# EAGLE board DC_bias_circuit (EAGLE 6.5.0)
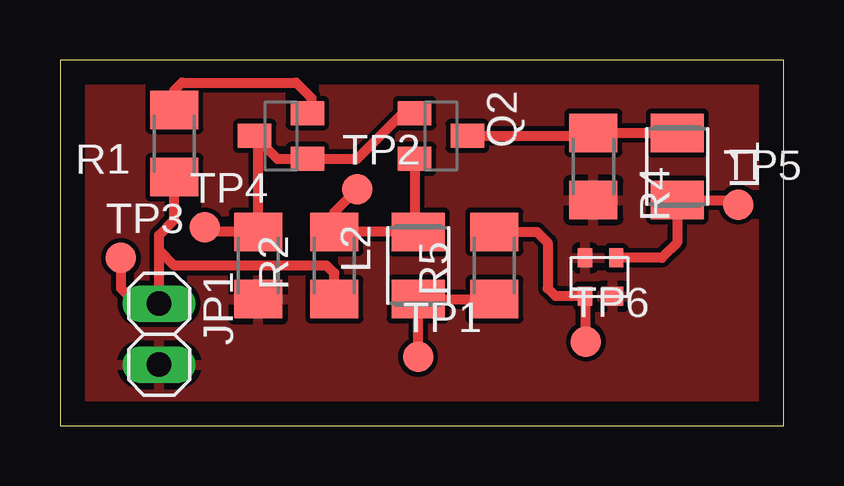
[diagram p0: board, top side]

Size 30.15 x 15.23 mm. Coordinates in mm from the lower left corner, seen from the top.
Outline: 0,0 30.15,0 30.15,15.23 0,15.23 0,0
Copper layers (1*16): Top 0.035mm / dielectric 1.5mm / Bottom 0.035mm
Design rules "default": minimum track width 10mil, minimum drill 24mil, track to track 8mil, track to pad 8mil, pad to pad 8mil, via to via 8mil, smd to smd 8mil, copper to edge 40mil, drill to drill 8mil, minimum pad ring 10mil, minimum via ring 8mil, stop-mask expansion 4mil, vias tented up to drill 0mil, thermal gap 10mil

## Footprints (pad centres in the part's own frame; a part is rotated, then mirrored left to right if it is on the bottom)
1X02 = drill 1.016 long: 1 -1.27,0; 2 1.27,0
L3225M = smd 1.6 x 2.2: 1 -1.4,0; 2 1.4,0
SOT23-BEC = smd 1 x 1.4: B -0.95,-1.1; C 0,1.1; E 0.95,-1.1
SOT-343 = smd 0.6 x 0.8: 1 1.3,1.6; 3 0,0; 4 1.3,0 | smd 0.9 x 0.8: 2 0.15,1.6
M1206 = smd 1.6 x 2: 1 -1.4,0; 2 1.4,0
B1,27 = smd 1.27 x 1.27: TP 0,0

## Placement (x,y rotation side)
JP1  [1X02]  4.13,3.81 270 top
L1  820nH  [L3225M]  25.72,10.79 270 top
L2  820nH  [L3225M]  14.92,6.67 270 top
Q1  MMBT3906LT1SMD  [SOT23-BEC]  9.21,12.06 90 top
Q2  MMBT3906LT1SMD  [SOT23-BEC]  15.88,12.06 270 top
Q3  SAV-541+  [SOT-343]  23.18,6.99 180 top
R1  3570  [M1206]  4.76,11.75 270 top
R2  33.2  [M1206]  11.43,6.67 270 top
R3  4320  [M1206]  8.26,6.67 270 top
R4  4320  [M1206]  22.23,10.79 270 top
R5  xxx  [M1206]  18.1,6.67 90 top
TP1  TPB1,27  [B1,27]  14.92,2.86 0 top
TP2  TPB1,27  [B1,27]  12.38,9.84 0 top
TP3  TPB1,27  [B1,27]  2.54,6.99 0 top
TP4  TPB1,27  [B1,27]  6.03,8.26 0 top
TP5  TPB1,27  [B1,27]  28.26,9.21 0 top
TP6  TPB1,27  [B1,27]  21.91,3.49 0 top

## Library data of the parts
JP1 = pinhead
L1 L2 = resistor
Q1 Q2 = transistor-pnp
Q3 = ECE532_Parts
R1-R5 = rcl
TP1-TP6 = testpad

## Nets
+5V: JP1.1 R1.2 R2.2 TP3.TP
DRAIN: Q3.1 R5.2 TP6.TP
GATE: L1.2 Q3.3 TP5.TP
GND: JP1.2 Q3.2 Q3.4 R3.2 R4.2
N$1: Q1.B Q1.C Q2.B R3.1 TP4.TP
N$2: L1.1 Q2.C R4.1
N$4: Q1.E R1.1
N$6: L2.1 Q2.E R2.1 TP2.TP
N$9: L2.2 R5.1 TP1.TP

## Tracks (layer width: path | path; a pad name or v marks a point on that pad's centre or on a via)
+5V
  Top 0.406: 4.13,7.3 JP1.1 3.17,5.08 2.54,5.71 TP3.TP | 4.13,7.3 4.13,7.94 4.76,8.57 R1.2 | R2.2 11.43,6.35 11.11,6.67 4.76,6.67 4.13,7.3
DRAIN
  Top 0.406: R5.2 19.87,8.07 20.32,7.62 20.32,5.71 20.64,5.4 21.86,5.4 Q3.1 21.88,3.52 TP6.TP
GATE
  Top 0.406: Q3.3 25.08,6.99 25.72,7.62 L1.2 28.07,9.39 TP5.TP
GND
  pour Top: -3.17,0 33.02,0 33.02,26.04 0,26.04
N$1
  Top 0.406: Q2.B 14.29,13.02 12.38,11.11 Q1.B 9.06,11.12 Q1.C 8.26,11.92 R3.1 6.22,8.07 TP4.TP
N$2
  Top 0.406: Q2.C 22.36,12.06 | 22.86,12.06 22.36,12.06 | 22.36,12.06 R4.1 L1.1
N$4
  Top 0.406: R1.1 4.76,13.97 5.08,14.29 9.84,14.29 10.48,13.65 10.48,13.19 Q1.E
N$6
  Top 0.406: Q2.E 14.78,8.21 L2.1 R2.1 11.43,8.89 TP2.TP
N$9
  Top 0.406: R5.1 L2.2 TP1.TP